# EAGLE board teclado_severino_importado (EAGLE 7.3.0)
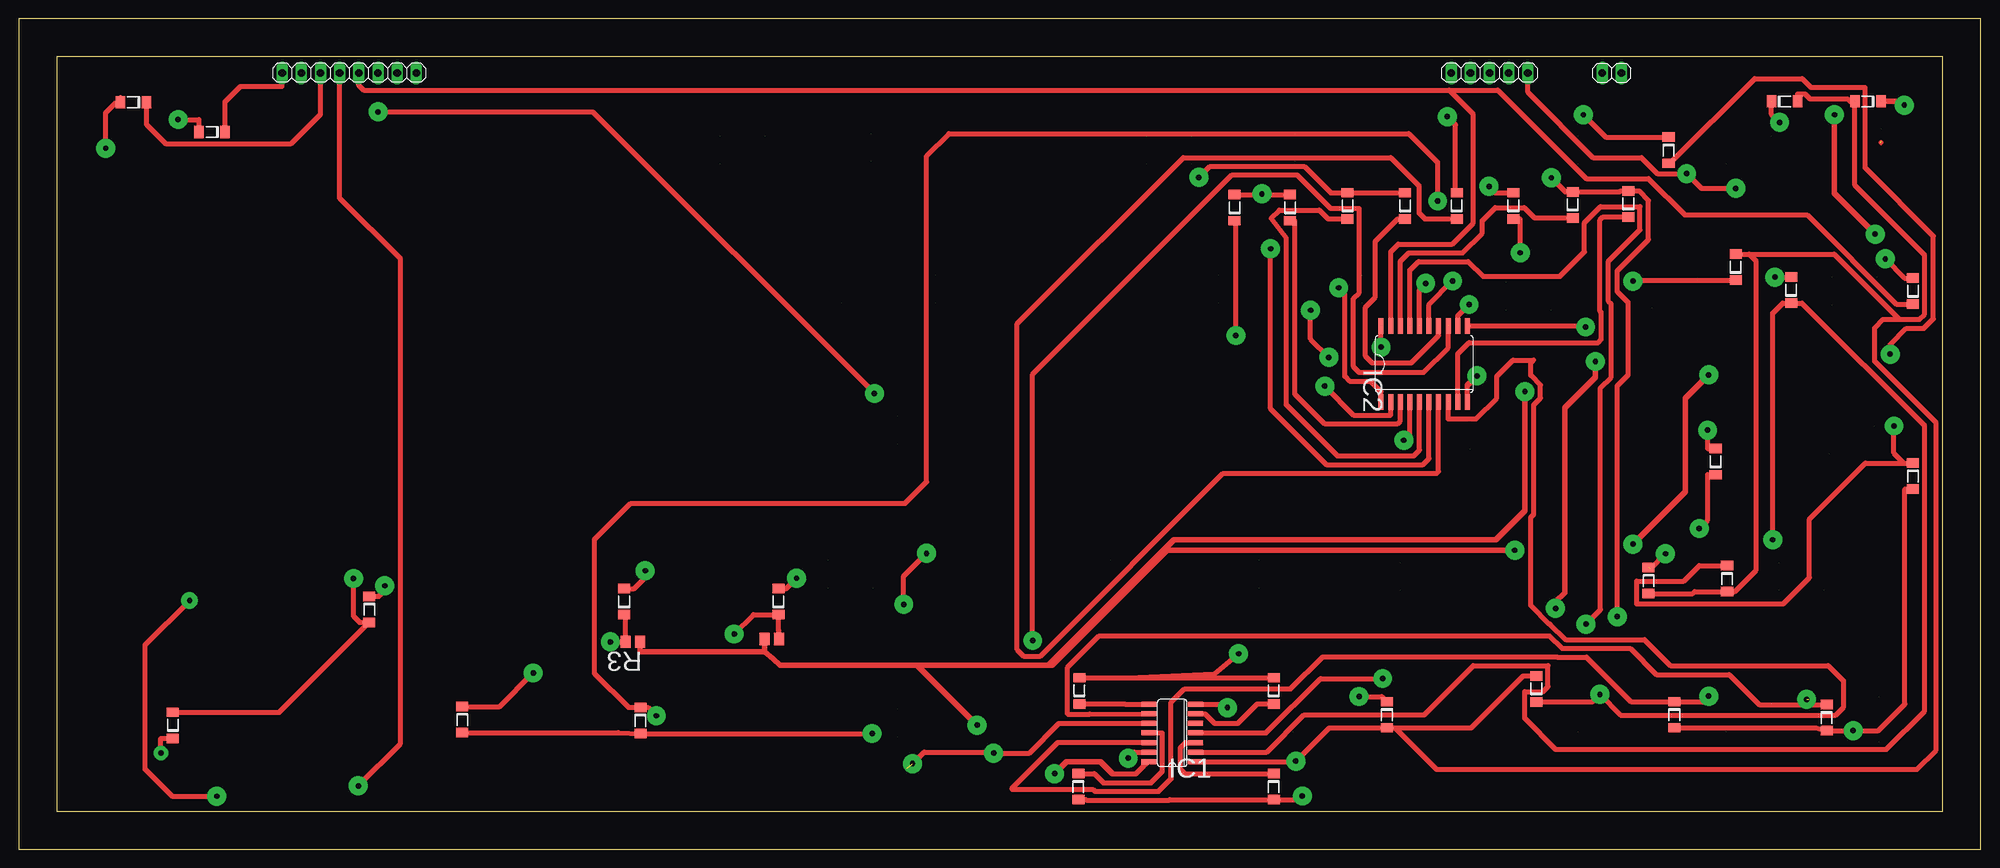
[diagram p0: board, top side]
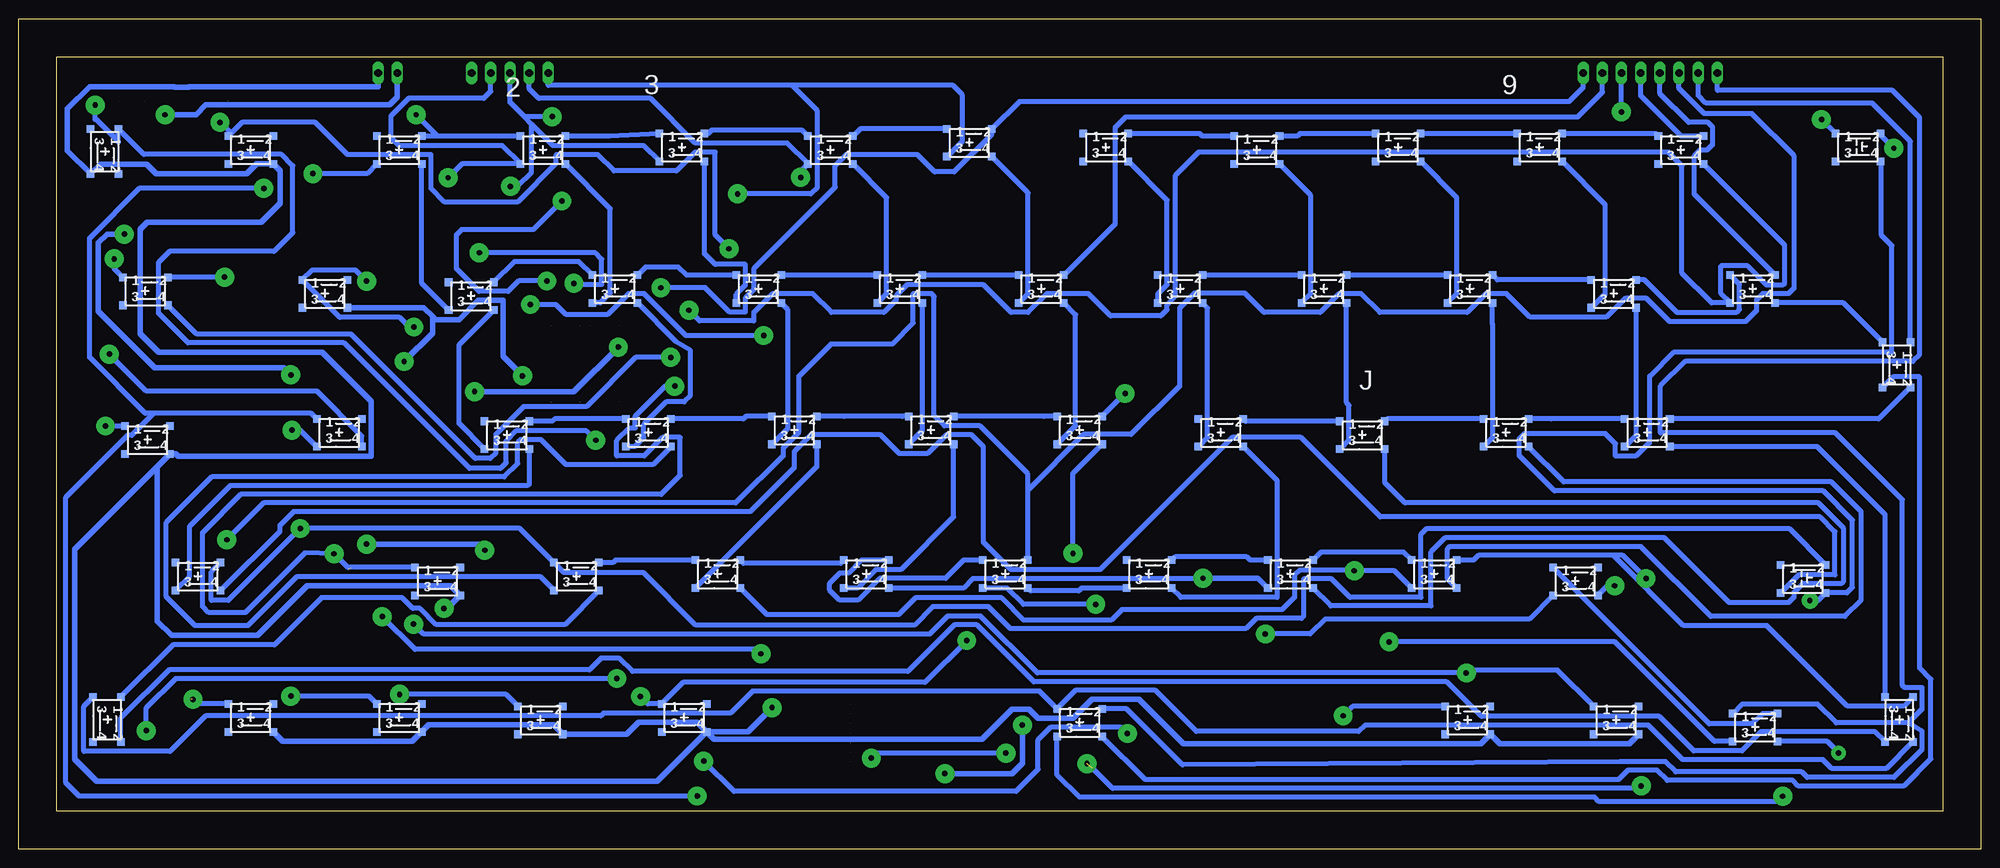
[diagram p1: board, bottom side, seen from below]

Size 260 x 110 mm. Coordinates in mm from the lower left corner, seen from the top.
Outline: 0,0 260,0 260,110 0,110 0,0
Copper layers (1*16): Top 0.035mm / dielectric 1.5mm / Bottom 0.035mm
Design rules "keyboard": minimum track width 10mil, minimum drill 24mil, track to track 8mil, track to pad 8mil, pad to pad 8mil, via to via 8mil, smd to smd 8mil, copper to edge 40mil, drill to drill 8mil, minimum pad ring 0mil, minimum via ring 0mil, stop-mask expansion 4mil, vias tented up to drill 0mil, thermal gap 10mil
Milling: 4 lines

## Footprints (pad centres in the part's own frame; a part is rotated, then mirrored left to right if it is on the bottom)
B3F-40XX_2PRIMARY = smd 1 x 1: 1 -3.048,1.778; 2 2.921,1.778; 3 -3.048,-1.905; 4 2.921,-1.905
MINISWITCH_SMD_1PRIMARY = smd 1 x 1: 1 -3.048,1.778; 2 2.921,1.778; 3 -3.048,-1.905; 4 2.921,-1.905
MELF-D3512-1405_1PRIMARY = smd 1.25 x 1.6: 1 -1.725,0; 2 1.725,0
P:EX59Y59D591 = drill 1.5 pad 1.5: 1 0,0
P:EX118Y118D1181 = drill 3 pad 3: 1 0,0
B3F-40XX_1PRIMARY = smd 1 x 1: 1 -3.048,1.778; 2 2.921,1.778; 3 -3.048,-1.905; 4 2.921,-1.905
SO14_1PRIMARY = smd 0.66 x 2.032: 1 -3.81,-3.073; 2 -2.54,-3.073; 3 -1.27,-3.073; 4 0,-3.073; 5 1.27,-3.073; 6 2.54,-3.073; 7 3.81,-3.073; 8 3.81,3.073; 9 2.54,3.073; 10 1.27,3.073; 11 0,3.073; 12 -1.27,3.073; 13 -2.54,3.073; 14 -3.81,3.073
SO20W_1PRIMARY = smd 0.66 x 2.032: 1 -5.715,-5.029; 2 -4.445,-5.029; 3 -3.175,-5.029; 4 -1.905,-5.029; 5 -0.635,-5.029; 6 0.635,-5.029; 7 1.905,-5.029; 8 3.175,-5.029; 9 4.445,-5.029; 10 5.715,-5.029; 11 5.715,5.029; 12 4.445,5.029; 13 3.175,5.029; 14 1.905,5.029; 15 0.635,5.029; 16 -0.635,5.029; 17 -1.905,5.029; 18 -3.175,5.029; 19 -4.445,5.029; 20 -5.715,5.029
1X05_1PRIMARY = drill 1.016 pad 1.524 long: 1 -5.08,0; 2 -2.54,0; 3 0,0; 4 2.54,0; 5 5.08,0
1X08_1PRIMARY = drill 1.016 pad 1.524 long: 1 -8.89,0; 2 -6.35,0; 3 -3.81,0; 4 -1.27,0; 5 1.27,0; 6 3.81,0; 7 6.35,0; 8 8.89,0
1X02_1PRIMARY = drill 1.016 pad 1.524 long: 1 -1.27,0; 2 1.27,0
M0805_1PRIMARY = smd 1.321 x 1.6: 1 -0.95,0; 2 0.965,0

## Placement (x,y rotation side)
0  [B3F-40XX_2PRIMARY]  39.67,92.68 0 bottom
1  [B3F-40XX_2PRIMARY]  209.52,92.68 0 bottom
2  [B3F-40XX_2PRIMARY]  190.47,92.68 0 bottom
3  [B3F-40XX_2PRIMARY]  172.05,93.01 0 bottom
4  [B3F-40XX_2PRIMARY]  152.37,92.68 0 bottom
5  [B3F-40XX_2PRIMARY]  133.95,93.64 0 bottom
6  [B3F-40XX_2PRIMARY]  115.87,93.01 0 bottom
7  [B3F-40XX_2PRIMARY]  95.85,92.68 0 bottom
8  [B3F-40XX_2PRIMARY]  77.13,93.01 0 bottom
9  [B3F-40XX_2PRIMARY]  58.39,93.01 0 bottom
,_COMMA_  [B3F-40XX_2PRIMARY]  29.81,16.17 0 bottom
._PERIOD_  [B3F-40XX_2PRIMARY]  53.64,35.53 0 bottom
A  [B3F-40XX_2PRIMARY]  195.24,54.91 0 bottom
B  [B3F-40XX_2PRIMARY]  110.15,36.49 0 bottom
BREAK  [MINISWITCH_SMD_1PRIMARY]  16.17,93.01 0 bottom
C  [B3F-40XX_2PRIMARY]  147.62,36.49 0 bottom
CAPS  [MINISWITCH_SMD_1PRIMARY]  23.46,35.86 0 bottom
CAPS1  [B3F-40XX_2PRIMARY]  236.19,36.16 0 bottom
CAPSLOCK  [B3F-40XX_2PRIMARY]  204.44,35.53 0 bottom
D  [B3F-40XX_2PRIMARY]  157.14,55.54 0 bottom
D1  [MELF-D3512-1405_1PRIMARY]  251.03,73.93 270 top
D2  [MELF-D3512-1405_1PRIMARY]  25.61,95.01 0 top
D3  [MELF-D3512-1405_1PRIMARY]  15.19,98.95 0 top
D4  [MELF-D3512-1405_1PRIMARY]  218.65,92.6 90 top
D5  [MELF-D3512-1405_1PRIMARY]  224.87,51.32 270 top
D6  [MELF-D3512-1405_1PRIMARY]  100.66,32.78 270 top
D7  [MELF-D3512-1405_1PRIMARY]  205.95,85.36 270 top
D8  [MELF-D3512-1405_1PRIMARY]  198.07,85.23 270 top
D9  [MELF-D3512-1405_1PRIMARY]  80.22,32.78 270 top
D10  [MELF-D3512-1405_1PRIMARY]  183.72,85.23 270 top
D11  [MELF-D3512-1405_1PRIMARY]  20.4,16.4 270 top
D12  [MELF-D3512-1405_1PRIMARY]  46.43,31.77 90 top
D13  [MELF-D3512-1405_1PRIMARY]  161.11,84.98 270 top
D14  [MELF-D3512-1405_1PRIMARY]  166.32,8.27 90 top
D15  [MELF-D3512-1405_1PRIMARY]  226.39,35.83 90 top
D16  [MELF-D3512-1405_1PRIMARY]  213.31,85.49 270 top
D17  [MELF-D3512-1405_1PRIMARY]  215.98,35.58 90 top
D18  [MELF-D3512-1405_1PRIMARY]  190.58,85.23 270 top
D19  [MELF-D3512-1405_1PRIMARY]  245.06,99.08 0 top
D20  [MELF-D3512-1405_1PRIMARY]  234.01,99.08 180 top
D21  [MELF-D3512-1405_1PRIMARY]  201.12,21.22 270 top
D22  [MELF-D3512-1405_1PRIMARY]  58.75,17.16 90 top
D23  [MELF-D3512-1405_1PRIMARY]  82.37,17.03 90 top
D24  [MELF-D3512-1405_1PRIMARY]  181.31,17.8 90 top
D25  [MELF-D3512-1405_1PRIMARY]  227.54,77.1 270 top
D26  [MELF-D3512-1405_1PRIMARY]  166.32,20.97 270 top
D27  [MELF-D3512-1405_1PRIMARY]  251.03,49.42 90 top
D28  [MELF-D3512-1405_1PRIMARY]  239.6,17.41 90 top
D29  [MELF-D3512-1405_1PRIMARY]  176.1,85.23 270 top
D30  [MELF-D3512-1405_1PRIMARY]  168.48,84.98 270 top
D31  [MELF-D3512-1405_1PRIMARY]  219.41,17.8 90 top
D32  [MELF-D3512-1405_1PRIMARY]  140.54,20.97 270 top
D33  [MELF-D3512-1405_1PRIMARY]  140.41,8.27 90 top
DELETE  [B3F-40XX_2PRIMARY]  243.17,73.96 0 bottom
DEXTRA  [MELF-D3512-1405_1PRIMARY]  234.9,74.06 270 top
DOWN  [B3F-40XX_2PRIMARY]  48.23,17.11 0 bottom
DUMMY1  [P:EX59Y59D591]  253.97,63.8 0 top
DUMMY2  [P:EX59Y59D591]  4.73,55.21 0 top
DUMMY3  [P:EX118Y118D1181]  238.33,103.39 0 top
DUMMY4  [P:EX118Y118D1181]  162.86,103.47 0 top
DUMMY5  [P:EX118Y118D1181]  86.96,103.17 0 top
DUMMY6  [P:EX118Y118D1181]  6.17,103.14 0 top
DUMMY7  [P:EX118Y118D1181]  53.64,63.47 0 top
DUMMY8  [P:EX118Y118D1181]  129.51,64.1 0 top
DUMMY9  [P:EX118Y118D1181]  205.71,63.8 0 top
DUMMY10  [P:EX118Y118D1181]  220.01,27.6 0 top
DUMMY11  [P:EX118Y118D1181]  133.32,17.44 0 top
DUMMY12  [P:EX118Y118D1181]  38.81,27.19 0 top
E  [B3F-40XX_2PRIMARY]  161.89,74.26 0 bottom
EDIT  [B3F-40XX_2PRIMARY]  217.47,55.21 0 bottom
ENTER  [B3F-40XX_1PRIMARY]  11.09,64.1 270 bottom
EXTEND  [B3F-40XX_2PRIMARY]  242.87,54.27 0 bottom
F  [B3F-40XX_2PRIMARY]  139.03,55.54 0 bottom
G  [B3F-40XX_2PRIMARY]  119.35,55.54 0 bottom
GRAPHICS  [B3F-40XX_2PRIMARY]  219.37,73.63 0 bottom
H  [B3F-40XX_2PRIMARY]  100.63,55.21 0 bottom
I  [B3F-40XX_2PRIMARY]  67.61,74.26 0 bottom
IC1  74HC32  [SO14_1PRIMARY]  152.86,15.38 90 top
IC2  74LS244DW  [SO20W_1PRIMARY]  186.26,64.28 0 top
INVV  [B3F-40XX_2PRIMARY]  229.2,92.68 0 bottom
J  [B3F-40XX_2PRIMARY]  81.88,54.91 0 bottom
JP1  [1X05_1PRIMARY]  194.91,102.84 180 top
JP2  [1X08_1PRIMARY]  43.78,102.84 180 top
JP3  [1X02_1PRIMARY]  211.12,102.84 0 top
K  [B3F-40XX_2PRIMARY]  62.83,55.21 0 bottom
L  [B3F-40XX_2PRIMARY]  44.11,55.21 0 bottom
LEFT  [B3F-40XX_2PRIMARY]  190.8,17.11 0 bottom
M  [B3F-40XX_2PRIMARY]  72.36,36.49 0 bottom
N  [B3F-40XX_2PRIMARY]  91.41,36.49 0 bottom
O  [B3F-40XX_2PRIMARY]  48.56,73.63 0 bottom
P  [B3F-40XX_2PRIMARY]  30.14,74.26 0 bottom
Q  [B3F-40XX_2PRIMARY]  199.99,73.32 0 bottom
QUOTES  [B3F-40XX_2PRIMARY]  209.52,17.44 0 bottom
R  [B3F-40XX_2PRIMARY]  143.17,74.26 0 bottom
R2  10K  [M0805_1PRIMARY]  99.77,27.83 0 top
R3  10K  [M0805_1PRIMARY]  81.36,27.45 180 top
RIGHT  [B3F-40XX_2PRIMARY]  171.75,17.44 0 bottom
S  [B3F-40XX_2PRIMARY]  176.5,55.21 0 bottom
SEMICOLON  [B3F-40XX_2PRIMARY]  229.2,17.44 0 bottom
SPACE  [B3F-40XX_2PRIMARY]  119.35,16.81 0 bottom
SYMB  [B3F-40XX_1PRIMARY]  10.76,17.11 270 bottom
SYMB1  [B3F-40XX_1PRIMARY]  248.25,17.11 270 bottom
T  [B3F-40XX_2PRIMARY]  124.43,74.26 0 bottom
TRUEV  [B3F-40XX_1PRIMARY]  248.58,92.37 270 bottom
U  [B3F-40XX_2PRIMARY]  86.96,74.26 0 bottom
UP  [B3F-40XX_2PRIMARY]  67.91,17.11 0 bottom
V  [B3F-40XX_2PRIMARY]  129.2,36.49 0 bottom
W  [B3F-40XX_2PRIMARY]  180.94,74.26 0 bottom
X  [B3F-40XX_2PRIMARY]  167.3,36.49 0 bottom
Y  [B3F-40XX_2PRIMARY]  106.01,74.26 0 bottom
Z  [B3F-40XX_2PRIMARY]  186.02,36.16 0 bottom

## Library data of the parts
0 1-9 ,_COMMA_ ._PERIOD_ A B BREAK C CAPS CAPS1 CAPSLOCK D D1-D33 DELETE DEXTRA DOWN DUMMY1-DUMMY12 E EDIT ENTER EXTEND F G GRAPHICS H I IC1 IC2 INVV J JP1-JP3 K L LEFT M N O P Q QUOTES R R2 R3 RIGHT S SEMICOLON SPACE SYMB SYMB1 T TRUEV U UP V W X Y Z = keyboard

## Nets
A8: D3.2 DEXTRA.2 IC1.2 JP2.6 V.2
A9: G.2 JP2.3
A10: JP2.2 T.2
A11: 5.2 IC2.1 JP2.1
A12: 0.2 D1.2 IC2.19 JP2.4
A13: IC1.10 IC1.13 JP2.5 P.2
A14: ENTER.1 JP2.7
A15: IC1.5
CAPSLOCK: CAPSLOCK.1 D17.2 IC2.2
D0: 1.3 D14.1 D33.1 EDIT.1 JP1.1
D1: 2.3 D7.1 D16.1 D26.1 D32.1 JP1.2
D2: 3.3 D8.1 D18.1 JP1.3
D3: 4.3 D10.1 D29.1 JP1.4
D4: 5.3 D13.1 D30.1 JP1.5
DOWN: D22.2 DOWN.1 IC2.17
EXTEND: D15.2 D27.2 EXTEND.1
GND: CAPSLOCK.4 DOWN.4 EXTEND.4 GRAPHICS.4 IC1.7 IC2.10 INVV.4 JP3.2 LEFT.4 QUOTES.4 RIGHT.4 SEMICOLON.4 TRUEV.4 UP.4
GRAPHICS: D25.2 GRAPHICS.1 IC2.11
INVV: D20.2 IC2.6 INVV.1
LEFT: D21.2 IC2.8 LEFT.1
NET0_1: 0.1 9.2
NET0_4: 0.4 DELETE.4 P.3
NET1_2: 1.2 2.1 D4.2
NET1_4: 1.4 Q.3
NET2_2: 2.2 3.1
NET2_4: 2.4 W.3
NET3_2: 3.2 4.1
NET3_4: 3.4 E.3
NET4_2: 4.2 5.1
NET4_4: 4.4 R.3
NET5_4: 5.4 T.3
NET6_2: 6.2 7.1
NET6_4: 6.4 Y.3
NET7_2: 7.2 8.1
NET7_4: 7.4 U.3
NET8_2: 8.2 9.1
NET8_4: 8.4 I.3
NET9_4: 9.4 O.3
NET,_COMMA__2: ,_COMMA_.2 ._PERIOD_.1
NET,_COMMA__3: ,_COMMA_.3 D9.2 R3.2
NET,_COMMA__4: ,_COMMA_.4 D11.2
NET._PERIOD__3: ._PERIOD_.3 D6.2 R2.2
NET._PERIOD__4: ._PERIOD_.4 D12.2
NETA_2: A.2 S.1
NETA_3: A.3 Q.4
NETA_4: A.4 CAPS1.3
NETB_2: B.2 N.1
NETB_3: B.3 V.4
NETB_4: B.4 H.4
NETC_1: C.1 X.2
NETC_2: C.2 V.1
NETC_3: C.3 F.4
NETC_4: C.4 D6.1 N.3
NETCAPS1_2: CAPS1.2 Z.1
NETCAPS1_4: CAPS1.4
NETD1_A: D1.1 DELETE.1
NETD4_A: D4.1 EDIT.4
NETD5_A: D5.1 EDIT.3
NETD7_C: D7.2 IC2.18
NETD8_C: D8.2 IC2.16
NETD9_A: D9.1 M.3 X.4
NETD10_C: D10.2 IC2.14
NETD11_A: D11.1 D12.1 M.2 SYMB.1
NETD13_C: D13.2 IC2.12
NETD14_C: D14.2 IC1.3
NETD15_A: D15.1 D17.1 D19.1 D20.1 D21.1 D22.1 D23.1 D24.1 D25.1 IC1.1
NETD16_C: D16.2 IC2.9
NETD18_C: D18.2 IC2.7
NETD26_C: D26.2 IC1.6
NETD27_A: D27.1 D28.1 D31.1 IC1.4
NETD29_C: D29.2 IC2.5
NETD30_C: D30.2 IC2.3
NETD32_C: D32.2 IC1.8
NETD33_C: D33.2 IC1.11
NETD_1: D.1 S.2
NETD_2: D.2 F.1
NETD_3: D.3 E.4
NETD_4: D.4 X.3
NETDELETE_2: DELETE.2 DEXTRA.1
NETE_1: E.1 W.2
NETE_2: E.2 R.1
NETENTER_2: ENTER.2 L.2
NETENTER_3: ENTER.3 P.4
NETENTER_4: ENTER.4 SPACE.4
NETF_2: F.2 G.1
NETF_3: F.3 R.4
NETG_3: G.3 T.4
NETG_4: G.4 V.3
NETH_2: H.2 J.1
NETH_3: H.3 Y.4
NETI_1: I.1 U.2
NETI_2: I.2 O.1
NETI_4: I.4 K.3
NETJ_2: J.2 K.1
NETJ_3: J.3 U.4
NETJ_4: J.4 N.4
NETK_2: K.2 L.1
NETK_4: K.4 M.4
NETL_3: L.3 O.4
NETL_4: L.4 SYMB.3
NETM_1: M.1 N.2
NETO_2: O.2 P.1
NETQ_2: Q.2 W.1
NETR_2: R.2 T.1
NETS_3: S.3 W.4
NETS_4: S.4 Z.3
NETSPACE_1: SPACE.1 SYMB1.3 SYMB.2
NETSYMB1_1: SYMB1.1 Z.4
NETSYMB1_2: SYMB1.2 SYMB.4
NETU_1: U.1 Y.2
NETX_1: X.1 Z.2
QUOTES: D31.2 IC1.12 QUOTES.1
RIGHT: D24.2 IC2.13 RIGHT.1
SEMICOLON: D28.2 IC1.9 SEMICOLON.1
TRUEV: D19.2 IC2.4 TRUEV.1
UP: D23.2 IC2.15 UP.1
VCC: IC1.14 IC2.20 JP3.1 R2.1 R3.1
VET: ,_COMMA_.1 D2.2 JP2.8 SPACE.2

## Tracks (layer width: path | path; a pad name or v marks a point on that pad's centre or on a via)
A8  (via drill 0.71 pad 2.5)  (2 unrouted)
  Top 0.65: D3.2 16.92,95.98 19.43,93.46 36.09,93.46 39.97,97.35 JP2.6 | IC1.2 165.38,12.84 170.33,17.8 186.26,17.8 192.76,24.3 202.67,24.3 202.67,21.53 202.01,20.87 199.57,20.87 199.57,17.31 203.66,13.22 247.52,13.22 252.58,18.28 252.58,56.07 236.32,72.33 DEXTRA.2 233.76,72.33 232.44,71.01 v232.44,40.98
  Bottom 0.65: JP2.6 39.97,100.79 36.63,97.45 30.32,97.45 24.71,91.84 24.71,74.36 25.48,73.58 28.87,73.58 29.67,72.79 29.67,71.39 31.17,69.89 41.22,69.89 44.3,72.96 47.12,72.96 49.61,70.47 59.72,70.47 62.84,73.6 65.56,73.6 68.05,71.11 79.63,71.11 82.12,73.6 85.04,73.6 87.53,71.11 94.97,71.11 97.51,73.65 104.22,73.65 106.15,71.72 106.15,61.37 112.59,54.93 118.88,54.93 126.28,47.52 | V.2 126.28,47.52 | v232.44,40.98 227.57,45.85 164.99,45.85 158.66,52.18 158.66,53.19 156.62,55.23 156.62,62.68 152.38,66.92 144.27,66.92 141.48,69.71 141.48,73.58 139.03,73.58 138.69,73.24 138.69,57.42 137.34,56.07 132.63,56.07 126.28,49.72 126.28,47.52
A9  (via drill 0.71 pad 2.5)  (2 unrouted)
  Top 0.65: v113.39,60.36 76.07,97.68 v47.59,97.68
  Bottom 0.65: v113.39,60.36 G.2 | v47.59,97.68 JP2.3
A10  (2 unrouted)
  Bottom 0.65: T.2 114.68,82.87 114.68,95.65 113.34,96.99 53.42,96.99 50.13,100.28 JP2.2
A11  (via drill 0.71 pad 2.5)  (2 unrouted)
  Top 0.65: IC2.1 180.55,60.59 179.15,61.99 176.35,61.99 175.72,62.63 175.72,73.57 v174.92,74.37
  Bottom 0.65: v174.92,74.37 169.03,74.37 165.79,71.13 163.72,71.13 163.72,73.04 162.56,74.2 162.56,76.98 151.82,87.72 151.82,90.57 150.37,92.01 140.92,92.01 138.64,89.73 136.04,89.73 131.03,94.74 5.2 127.41,99.05 54.57,99.05 52.67,100.94 JP2.1
A12  (2 unrouted)
  Top 0.65: IC2.19 181.82,79.14 182.83,80.15 189.97,80.15 192.76,82.95 192.76,97.35 189.56,100.55 | JP2.4 45.05,101.2 45.71,100.55 189.56,100.55 | D1.2 248.84,72.2 237.02,84.03 220.78,84.03 215.97,88.84 207.73,88.84 196.02,100.55 189.56,100.55
  Bottom 0.65: 0.2 39.7,94.46 45.05,99.81 JP2.4
A13  (via drill 0.71 pad 2.5)  (5 unrouted)
  Top 0.65: v118.44,11.32 119.97,12.84 129.06,12.84 v129.19,12.71 133.91,12.71 137.85,16.65 IC1.10 | JP2.5 42.51,86.26 50.57,78.2 50.57,13.96 v44.99,8.37 | IC1.13 147.81,12.84 v147.02,12.05
  Bottom 0.65: 117.68,10.68 115.04,8.04 45.32,8.04 v44.99,8.37 | P.2 37.98,86.79 37.98,91.84 37.19,92.62 36.27,92.62 35.51,93.39 35.51,95.65 36.16,96.29 38.7,96.29 42.51,100.11 JP2.5 | v147.02,12.05 146.36,12.71 v129.19,12.71
A14  (1 unrouted)
  Bottom 0.65: JP2.7 37.43,99.88 36.4,98.85 14.39,98.85 9.32,93.78 ENTER.1
CAPSLOCK  (via drill 0.71 pad 2.5)  (1 unrouted)
  Top 0.65: IC2.2 181.82,57.51 176.9,57.51 v173.08,61.33 | 216.27,37.17 v218.22,39.12
  Bottom 0.65: v173.08,61.33 174.35,61.33 178.32,57.36 178.32,55.77 179.15,55.77 180.77,54.14 180.77,52.08 177.12,52.08 174.65,54.55 172.34,54.55 172.34,49.52 174.86,47 230.58,47 235.65,41.94 235.65,32.15 234.83,31.33 229.97,31.33 222.06,39.25 v218.22,39.12 216.4,37.31 CAPSLOCK.1
D0  (via drill 0.71 pad 2.5)  (2 unrouted)
  Top 0.65: D33.1 141.42,6.54 141.49,6.48 152.49,6.48 152.55,6.54 D14.1 169.62,6.54 v170.1,7.03 | v227.54,87.54 222.99,87.54 v221.03,89.5 217.15,89.5 215.04,91.61 208.64,91.61 199.99,100.25 JP1.1
  Bottom 0.65: v227.54,87.54 244.05,87.54 250.63,80.95 250.63,65.13 243.22,57.72 242.12,57.72 | 1.3 213.84,89.5 v221.03,89.5 | EDIT.1 221.25,57.72 242.12,57.72 | 242.12,57.72 245.04,54.8 245.59,54.8 253.77,46.62 253.77,8.78 252.02,7.03 v170.1,7.03
D1  (via drill 0.71 pad 2.5)  (1 unrouted)
  Top 0.65: v203.1,88.94 204.96,87.08 D7.1 212.13,87.08 212.26,87.21 D16.1 214.71,87.21 215.99,85.93 215.99,80.74 211.84,76.6 211.84,73.85 213.29,72.4 213.29,62.84 211.84,61.38 v211.84,30.8 | v161.65,25.87 158.47,23.23 146.88,22.7 | D32.1 146.88,22.7 | 146.88,22.7 D26.1
  Bottom 0.65: v203.1,88.94 201.27,90.77 2.3 195.94,93.2 209.63,93.2 210.66,94.23 210.66,97.14 208.35,99.46 198.38,99.46 197.45,100.38 JP1.2 | v211.84,30.8 207.49,26.45 162.23,26.45 v161.65,25.87
D2  (via drill 0.71 pad 2.5)  (1 unrouted)
  Top 0.65: v189.31,97.04 190.4,95.95 190.4,86.96 D18.1 | D8.1 195.69,86.96 v194.85,87.8
  Bottom 0.65: 192.06,96.06 192.99,97 | 192.99,97 194.91,98.92 JP1.3 | 192.99,97 192.95,97.04 v189.31,97.04 | 3.3 177.21,93.21 189.2,93.21 192.06,96.06 | v194.85,87.8 193.9,87.8 192.06,89.64 192.06,96.06
D3  (via drill 0.71 pad 2.5)  (2 unrouted)
  Top 0.65: D10.1 D29.1 173.87,86.96 170.36,90.46 157.86,90.46 v156.39,88.99
  Bottom 0.65: v156.39,88.99 156.39,89.8 4.3 158.18,93.54 170.36,93.54 176.28,99.46 191.1,99.46 192.37,100.73 JP1.4
D4  (via drill 0.71 pad 2.5)  (1 unrouted)
  Top 0.65: v164.75,86.81 164.86,86.7 | D13.1 164.86,86.7 | 164.86,86.7 D30.1
  Bottom 0.65: 157.56,101.18 154.18,97.81 154.18,87.65 155.02,86.81 v164.75,86.81 | 5.3 134.95,93.79 134.95,99.91 136.22,101.18 157.56,101.18 | JP1.5 189.83,101.18 157.56,101.18
DOWN  (via drill 0.71 pad 2.5)  (1 unrouted)
  Top 0.65: IC2.17 184.36,76.71 185.5,77.85 192.1,77.85 194.07,75.89 204.24,75.89 207.5,79.14 207.5,83 209.63,85.13 214.84,85.13 214.84,82.03 210.69,77.89 210.69,72.58 211.03,72.25 211.03,62.52 209.63,61.13 209.63,31.74 v207.7,29.81 | v68.18,23.33 63.73,18.88 D22.2
  Bottom 0.65: v207.7,29.81 206.35,28.46 139.3,28.46 136.91,30.85 132.55,30.85 125.03,23.33 v68.18,23.33 67.81,23.7 56.09,23.7 DOWN.1
EXTEND  (via drill 0.71 pad 2.5)  (1 unrouted)
  Top 0.65: v248.52,56.05 248.52,52.47 249.84,51.14 | D15.2 222.71,37.55 220.65,35.5 214.43,35.5 214.43,32.48 233.84,32.48 237.31,35.96 237.31,43.73 244.73,51.14 249.84,51.14 | 249.84,51.14 D27.2
  Bottom 0.65: EXTEND.1 v248.52,56.05
GND  (via drill 0.71 pad 2.5)  (7 unrouted)
  Top 0.66: IC1.7 159.72,19.19 | IC2.10 191.98,61.43
  Top 0.7: v203.66,31.89 203.66,32.76 204.88,33.98 204.88,58.48 208.94,62.54 v208.94,64.61 | 159.72,19.19 v160.18,18.73 | 191.98,61.43 v193.25,62.7
  Bottom 0.7: 203.66,32.76 v203.66,31.89 203.25,31.89 CAPSLOCK.4 202.77,34.87 221.76,34.87 228.32,28.31 239.75,28.31 241.66,30.22 241.66,50.66 | RIGHT.4 163.37,15.54 v160.18,18.73 | RIGHT.4 167.87,14.58 132.35,14.58 128.4,18.53 126.12,18.53 124.9,17.31 120.33,17.31 117.8,19.84 111.55,19.84 105.65,13.93 66.27,13.93 UP.4 63.72,13.93 46.58,13.93 DOWN.4 | RIGHT.4 170.09,16.8 177.85,16.8 179.45,15.21 LEFT.4 189.14,16.47 205.66,16.47 QUOTES.4 207.87,14.27 225.01,14.27 SEMICOLON.4 | RIGHT.4 175.38,8.98 249.66,8.98 252.58,11.91 252.58,39.74 241.66,50.66 | GRAPHICS.4 206.33,71.72 205.18,70.58 | v193.25,62.7 195.81,65.27 195.81,72.69 199.11,72.69 201.65,70.14 204.75,70.14 205.18,70.58 | JP3.2 212.39,101.01 237.41,101.01 237.49,100.92 239.36,100.92 239.44,101.01 250.62,101.01 253.57,98.06 253.57,92.53 TRUEV.4 249.17,90.77 243.08,90.77 241.78,89.47 229.81,89.47 228.51,90.77 INVV.4 225.38,89.87 225.38,85.54 227.87,83.05 243,83.05 243.91,82.14 243.91,68.28 241.48,65.85 219.81,65.85 213.29,59.32 213.29,52.03 238.89,52.03 239.22,52.37 EXTEND.4 241.66,50.66 | 205.18,70.58 205.18,68.37 v208.94,64.61
GRAPHICS  (via drill 0.71 pad 2.5)  (1 unrouted)
  Top 0.65: v207.65,69.17 207.51,69.31 IC2.11 | v213.92,75.25 214.05,75.38 D25.2
  Bottom 0.65: v207.65,69.17 208.28,69.17 209.55,70.44 217.46,70.44 GRAPHICS.1 221.13,76.7 215.37,76.7 v213.92,75.25
INVV  (via drill 0.71 pad 2.5)  (2 unrouted)
  Top 0.65: v233.35,96.28 232.29,97.35 D20.2 | v165.89,79.54 165.89,58.33 173.28,50.94 186.11,50.94 186.9,51.73 IC2.6
  Bottom 0.65: 231.89,94.82 INVV.1 | v165.89,79.54 167.72,81.37 167.72,92.34 170.36,92.34 172.85,89.86 181.13,89.86 183.29,92.01 188.78,92.01 188.78,90.86 193.92,85.72 203.56,85.72 205.37,87.53 205.37,92.01 216.44,92.01 220.7,96.28 230.43,96.28 231.89,94.82 | 231.89,94.82 v233.35,96.28
LEFT  (via drill 0.71 pad 2.5)  (1 unrouted)
  Top 0.65: IC2.8 189.44,57.01 193.12,57.01 195.86,59.76 195.86,62.63 198.02,64.78 200.74,64.78 200.36,64.4 200.36,62.77 201.67,61.46 201.67,59.74 200.77,58.84 200.77,44.36 200.36,43.95 200.36,32.26 202.8,29.82 202.94,29.82 205.02,27.73 215.45,27.73 218.89,24.3 239.8,24.3 241.86,22.24 241.86,18.81 240.8,17.75 212.26,17.75 v209.53,20.49 208.54,19.5 D21.2
  Bottom 0.65: LEFT.1 195.44,20.49 v209.53,20.49
NET0_1
  Bottom 0.65: 9.2 43.05,94.79 0.1
NET0_4  (via drill 0.71 pad 2.5)  (1 unrouted)
  Top 0.65: v173.61,65.14 171.2,67.55 v171.2,71.39
  Bottom 0.65: 0.4 25.99,80.01 25.99,74.97 26.22,74.73 28.34,74.73 30.89,77.28 34.42,77.28 34.42,73.59 P.3 35.64,72.36 39.6,76.32 39.6,90.57 41.38,92.34 103.64,92.34 106.68,89.3 106.68,73.29 107.83,72.15 107.83,71.49 108.66,70.65 115.32,70.65 118.27,73.6 123.75,73.6 126.24,71.11 128.5,71.11 132.13,74.74 142.32,74.74 143.68,73.38 143.68,72.79 145.36,71.11 152.3,71.11 154.79,73.6 160.1,73.6 162.57,71.13 162.57,69.98 169.79,69.98 v171.2,71.39 | DELETE.4 236.41,68.21 215.98,68.21 199.52,51.76 197.49,51.76 196.78,52.47 196.78,54.98 193.12,58.64 184.76,58.64 178.26,65.14 v173.61,65.14
NET1_2  (via drill 0.71 pad 2.5)  (1 unrouted)
  Top 0.65: v207.34,97.3 210.32,94.32 D4.2
  Bottom 0.65: 204.5,94.46 1.2 | 204.5,94.46 v207.34,97.3 | 2.1 204.5,94.46
NET1_4  (2 unrouted)
  Bottom 0.65: Q.3 206.6,74.97 1.4
NET2_2
  Bottom 0.65: 3.1 181.76,94.46 2.2
NET2_4
  Bottom 0.65: W.3 182.96,72.36 181.62,73.7 181.62,84.84 2.4
NET3_2  (2 unrouted)
  Bottom 0.65: 4.1 156.21,95.25 168.16,95.25 168.63,94.79 3.2
NET3_4  (1 unrouted)
  Bottom 0.65: E.3 164.94,73.51 163.71,74.74 163.71,77.46 167.72,77.46 169.13,78.87 3.4
NET4_2  (1 unrouted)
  Bottom 0.65: 4.2 148.48,95.42 5.1
NET4_4  (1 unrouted)
  Bottom 0.65: 4.4 144.99,86.31 144.99,73.59 R.3
NET5_4
  Bottom 0.65: 5.4 126.24,86.95 126.24,73.59 T.3
NET6_2  (2 unrouted)
  Bottom 0.65: 6.2 103.49,94.79 103.16,94.46 7.1
NET6_4  (2 unrouted)
  Bottom 0.65: 6.4 107.84,85.99 107.84,74.79 109.06,73.57 Y.3
NET7_2  (1 unrouted)
  Bottom 0.65: 8.1 90.22,94.79 90.55,94.46 7.2
NET7_4  (1 unrouted)
  Bottom 0.65: U.3 88.78,73.59 88.78,86.62 7.4
NET8_2
  Bottom 0.65: 8.2 9.1
NET8_4
  Bottom 0.65: I.3 69.42,73.59 69.42,86.31 8.4
NET9_4
  Bottom 0.65: 9.4 49.77,85.4 49.77,73.56 O.3
NET,_COMMA__2
  Bottom 0.65: ._PERIOD_.1 35.98,16.6 30.23,16.6 28.88,17.95 ,_COMMA_.2
NET,_COMMA__3  (via drill 0.71 pad 2.5)
  Top 0.65: D9.2 80.39,31.06 R3.2 v78.39,27.45
  Bottom 0.65: v78.39,27.45 48.46,27.45 35.28,14.27 ,_COMMA_.3
NET,_COMMA__4  (via drill 0.71 pad 1.9)
  Top 0.65: v18.82,12.74 18.82,14.67 D11.2
  Bottom 0.65: ,_COMMA_.4 20.35,14.27 v18.82,12.74
NET._PERIOD__3  (via drill 0.71 pad 2.5)
  Top 0.65: R2.2 100.74,28.88 100.66,28.96 D6.2 97.37,31.06 v94.81,28.5
  Bottom 0.65: ._PERIOD_.3 59.83,30.48 86.85,30.48 88.83,28.5 v94.81,28.5
NET._PERIOD__4  (via drill 0.71 pad 2.5)
  Top 0.65: D12.2 47.7,33.49 48.49,34.28 v48.49,34.89
  Bottom 0.65: v48.49,34.89 49.45,34.89 ._PERIOD_.4
NETA_2  (1 unrouted)
  Bottom 0.65: S.1 188.98,56.99 189.28,56.69 A.2
NETA_3  (1 unrouted)
  Bottom 0.65: A.3 201.68,56.39 201.68,66.81 Q.4
NETA_4  (2 unrouted)
  Bottom 0.65: CAPS1.3 237.39,36.11 237.39,42.74 231.98,48.15 192.6,48.15 192.32,48.44 A.4
NETB_2  (1 unrouted)
  Bottom 0.65: B.2 106.78,38.73 97.26,38.73 96.81,38.27 N.1
NETB_3  (1 unrouted)
  Bottom 0.65: B.3 119.16,34.59 119.53,34.21 125.91,34.21 V.4
NETB_4  (1 unrouted)
  Bottom 0.65: B.4 106.01,33.36 93.22,33.36 93.22,48.82 H.4
NETBREAK_1  (via drill 0.71 pad 2.5)
  Top 0.65: v21.1,96.66 23.88,96.66 23.88,95.01
  Bottom 0.65: 19.22,94.79 v21.1,96.66
NETBREAK_2  (via drill 0.71 pad 2.5)
  Top 0.65: v11.51,92.85 11.51,97.55 12.91,98.95 13.47,98.95 13.47,99.58
  Bottom 0.65: v11.51,92.85 13.44,94.79 13.25,94.79
NETBREAK_4  (via drill 0.71 pad 2.2, 0.71 pad 2.5)
  Top 0.65: v22.63,32.93 16.74,27.04 16.74,10.56 20.3,7 v26.24,7
  Bottom 0.65: 13.25,91.1 13.16,91.1 13.16,81.35 11.76,79.95 11.76,65.8 40.72,65.8 43.87,62.65 43.87,53.89 45.7,52.06 48.39,52.06 48.39,53.74 49.71,55.06 60.45,55.06 61.14,54.37 61.14,52.14 56.47,47.46 20.88,47.46 16.99,43.57 16.99,34.69 17.72,33.95 20.54,33.95 21.56,32.93 v22.63,32.93 | v26.24,7 26.95,6.29 50.57,6.29 51.16,6.87 119.46,6.87 122.4,9.81 122.4,14.9
NETC_1  (1 unrouted)
  Bottom 0.65: C.1 151.09,37.85 163.96,37.85 X.2
NETC_2  (1 unrouted)
  Bottom 0.65: V.1 134.77,38.27 137.19,35.86 145.93,35.86 148.8,32.98 151.21,32.98 152.53,34.3 152.53,35.24 151.21,36.56 150.06,36.56 148.35,38.27 C.2
NETC_3
  Bottom 0.65: F.4 136.11,44.02 143.11,37.02 146.43,37.02 148.87,34.59 C.3
NETC_4  (via drill 0.71 pad 2.5)  (1 unrouted)
  Top 0.65: D6.1 101.7,34.51 v103.08,35.88
  Bottom 0.65: v103.08,35.88 95.75,35.88 95.7,35.83 | N.3 95.7,35.83 | C.4 134.83,34.59 133.59,35.83 95.7,35.83
NETCAPS1_2  (via drill 0.71 pad 2.5)  (1 unrouted)
  Top 0.65: v222.7,42.48 223.81,43.59 223.81,49.6 224.87,49.6
  Bottom 0.65: CAPS1.2 234.5,36.71 234.5,32.94 232.24,32.94 v222.7,42.48 193.61,42.48 Z.1 187.76,36.63 177.24,36.63 170.28,29.68 141.33,29.68 138.89,32.12 131.52,32.12 128.6,29.2 97.37,29.2 95.99,30.57 89.99,30.57 89.72,30.85 89.72,35.81 86.03,35.81 83.58,33.36 74.17,33.36 74.17,41.72 73.48,42.41 25.31,42.41 20.54,37.64
NETCAPS1_4  (1 unrouted)
  Bottom 0.65: 26.51,33.95 24.13,36.34 19.31,36.34 19.31,42.05 21.27,44.01 79.56,44.01 90.1,54.55 99.19,54.55 116.72,37.02 128.53,37.02 132.18,40.68 132.18,53.33 133.73,54.88 137.09,54.88 139.58,52.39 143.31,52.39 145.8,54.88 155.02,54.88 157.2,52.7 157.2,50.59 163.09,44.7 223.6,44.7 225.39,42.91 225.39,42.13 CAPS1.4
NETD1_A  (via drill 0.71 pad 2.5)  (1 unrouted)
  Top 0.65: D1.1 249.91,75.65 v247.36,78.21
  Bottom 0.65: v247.36,78.21 247.36,76.88 DELETE.1
NETD4_A  (via drill 0.71 pad 2.5)
  Top 0.65: D4.1 218.82,90.87 230.05,102.1 236.35,102.1 237.52,100.93 244.71,100.93 244.71,90.27 253.75,81.23 253.75,70.25 252.48,68.98 250.15,68.98 248.01,66.84 v248.01,65.57
  Bottom 0.65: v248.01,65.57 243.11,60.67 220.49,60.67 214.55,54.73 EDIT.4
NETD5_A  (via drill 0.71 pad 2.5)  (1 unrouted)
  Top 0.65: D5.1 223.81,53.05 v223.81,55.51
  Bottom 0.65: EDIT.3 222.72,55.51 v223.81,55.51
NETD7_C
  Top 0.65: IC2.18 183.09,77.87 184.22,79 191.33,79 193.93,81.6 193.93,83.28 195.66,85 199.5,85 200.87,83.63 D7.2
NETD8_C  (via drill 0.71 pad 2.5)  (1 unrouted)
  Top 0.65: D8.2 198.99,83.51 v198.99,79.01 | v186.44,74.94 185.63,74.13 IC2.16
  Bottom 0.65: v198.99,79.01 183.59,79.01 182.77,78.18 182.77,74.79 186.29,74.79 v186.44,74.94
NETD9_A  (via drill 0.71 pad 2.5)  (2 unrouted)
  Top 0.65: D9.1 81.56,34.51 83.01,35.96 v83.01,36.87 83.11,36.97
  Bottom 0.65: M.3 77.69,36.87 v83.01,36.87 | X.4 160.85,31.05 143.41,31.05 141.19,33.27 129.73,33.27 126.8,30.34 115.19,30.34 113.81,31.73 92.58,31.73 90.88,33.42 90.88,36.34 90.25,36.97 83.11,36.97
NETD10_C
  Top 0.65: IC2.14 188.17,68.04 184.53,64.4 179.35,64.4 178.46,65.29 178.46,71.81 179.78,73.14 179.78,80.53 182.76,83.51 D10.2
NETD11_A  (via drill 0.71 pad 2.5)
  Top 0.65: v44.35,35.86 44.35,30.85 45.16,30.04 D12.1 34.52,18.12 D11.1
  Bottom 0.65: v44.35,35.86 47.42,38.93 48.69,38.93 | M.2 67.21,38.27 66.56,38.93 48.69,38.93 | SYMB.1 10.21,18.94 17.65,18.94 28.32,29.61 39.37,29.61 48.69,38.93
NETD13_C  (via drill 0.71 pad 2.5)
  Top 0.65: D13.2 161.29,83.25 v161.29,68.04 | v192.2,72.15 190.71,70.65 IC2.12
  Bottom 0.65: v161.29,68.04 171.57,68.04 177.13,73.6 179.2,73.6 182,70.8 187.45,70.8 188.8,72.15 v192.2,72.15
NETD14_C
  Top 0.65: IC1.3 154.61,14.11 153.92,13.42 153.92,10.59 154.52,10 D14.2
NETD15_A  (via drill 0.71 pad 2.5)  (2 unrouted)
  Top 0.65: D17.1 221.83,33.85 222.08,34.1 D15.1 227.41,34.1 230.26,36.96 230.26,77.88 229.31,78.83 | 182.36,16.07 187.88,10.56 251.56,10.56 254.1,13.1 254.1,56.47 245.94,64.63 245.94,69.03 247.09,70.19 249.24,70.19 | D21.1 199.37,22.95 192.49,16.07 182.36,16.07 | IC1.1 169.17,11.57 173.66,16.07 | 173.66,16.07 D24.1 182.36,16.07 | v169.24,11.65 173.66,16.07 | v113.09,15.31 D23.1 79.45,15.44 D22.1 | D20.1 235.74,100.05 236.71,100.05 237.38,99.38 242.39,99.38 242.7,99.08 D19.1 243.34,87.92 252.58,78.68 252.58,70.88 251.89,70.19 249.24,70.19 | 249.24,70.19 240.59,78.83 229.31,78.83 | 173.66,16.07 | D25.1 229.31,78.83
  Bottom 0.65: v169.24,11.65 165.23,7.63 127.84,7.63 124.92,10.56 124.92,14.48 123.27,16.14 113.91,16.14 v113.09,15.31
NETD16_C
  Top 0.65: D16.2 209.94,83.76 209.54,83.36 209.54,71.25 209.72,71.06 209.72,67.52 209.3,67.1 192.21,67.1 190.71,65.6 IC2.9
NETD18_C
  Top 0.65: D18.2 186.32,83.51 185.61,84.22 185.61,87.81 181.81,91.61 154.31,91.61 132.29,69.59 132.29,26.43 133.18,25.55 135.37,25.55 159.61,49.79 187.92,49.79 188.17,50.04 IC2.7
NETD26_C
  Top 0.65: D26.2 164.14,19.24 161.55,16.66 158.47,16.66 157.2,17.92 IC1.6
NETD27_A  (via drill 0.71 pad 2.5)
  Top 0.65: D31.1 238.17,16.07 D28.1 v243.11,15.69 246.46,15.69 249.98,19.2 249.98,47.69 D27.1 | IC1.4 165.31,15.38 172.52,22.6 v180.75,22.6
  Bottom 0.65: v180.75,22.6 239.25,22.6 243.11,18.73 v243.11,15.69
NETD29_C  (1 unrouted)
  Top 0.65: IC2.5 185.63,52.85 184.86,52.09 174.74,52.09 167.97,58.87 167.97,80.91 165.97,83.58 167.06,84.67 172.34,84.67 173.51,83.51 D29.2
NETD30_C
  Top 0.65: D30.2 169.12,83.25 169.12,60.28 173.04,56.36 182.75,56.36 183.09,56.69 IC2.3
NETD32_C  (1 unrouted)
  Top 0.65: IC1.8 146.59,19.19 146.53,19.24 D32.2
NETD33_C  (1 unrouted)
  Top 0.65: IC1.11 151.56,15.38 151.56,10.28 150.06,8.78 143.74,8.78 142.53,10 D33.2
NETD_1
  Bottom 0.65: S.2 163.96,56.99 163.62,57.32 D.1
NETD_2
  Bottom 0.65: F.1 142.9,57.32 142.92,57.34 150.57,57.34 150.59,57.32 D.2
NETD_3  (1 unrouted)
  Bottom 0.65: D.3 158.07,55.76 158.07,71.45 E.4
NETD_4
  Bottom 0.65: D.4 154.22,50.72 X.3
NETDELETE_2  (via drill 0.71 pad 2.5)  (1 unrouted)
  Top 0.65: v232.74,75.78 DEXTRA.1
  Bottom 0.65: v232.74,75.78 232.78,75.74 DELETE.2
NETE_1  (1 unrouted)
  Bottom 0.65: W.2 176.95,77.11 172.6,77.11 171.53,76.04 E.1
NETE_2  (1 unrouted)
  Bottom 0.65: R.1 E.2
NETENTER_2
  Bottom 0.65: L.2 13.51,56.99 ENTER.2
NETENTER_3
  Bottom 0.65: P.4 18.21,72.36 ENTER.3
NETENTER_4  (1 unrouted)
  Bottom 0.65: SPACE.4 110.72,9.19 47.99,9.19 46.73,10.45 42.91,10.45 41.55,9.08 24.88,9.08 24.14,8.35 10.19,8.35 6.58,11.95 6.58,22.51 8.08,24.01 8.08,62.58 11.61,62.58 ENTER.4
NETF_2
  Bottom 0.65: F.2 124.18,57.32 G.1
NETF_3
  Bottom 0.65: F.3 140.25,55.47 R.4
NETG_3  (1 unrouted)
  Bottom 0.65: T.4 119.95,70.8 119.95,56.08 G.3
NETG_4  (via drill 0.71 pad 2.5)  (1 unrouted)
  Top 0.65: v120.3,39.18 117.27,36.16 v117.27,32.43
  Bottom 0.65: G.4 120.3,49.77 v120.3,39.18 | v117.27,32.43 126.88,32.43 129.04,34.59 V.3
NETH_2
  Bottom 0.65: J.1 97.4,56.68 H.2
NETH_3
  Bottom 0.65: H.3 102.44,54.55 102.44,71.71 Y.4
NETI_1
  Bottom 0.65: I.1 U.2
NETI_2
  Bottom 0.65: I.2 64.05,75.41 O.1
NETI_4
  Bottom 0.65: K.3 64.65,54.55 64.65,69.51 64.69,69.55 I.4
NETJ_2
  Bottom 0.65: K.1 78.66,56.99 J.2
NETJ_3
  Bottom 0.65: J.3 83.7,54.24 83.7,58.79 84.04,59.14 U.4
NETJ_4
  Bottom 0.65: N.4 86.11,32.21 72.84,32.21 72.84,39.38 70.98,41.24 41.9,41.24 33.31,32.65 25.48,32.65 24.73,33.41 24.73,34.05 23.6,35.18 18.42,35.18 18.14,35.47 18.14,42.5 21.5,45.86 76.28,45.86 78.96,48.55 J.4
NETK_2
  Bottom 0.65: L.1 47.18,57.01 56.9,57.01 56.92,56.99 K.2
NETK_4
  Bottom 0.65: K.4 55.25,48.65 19.77,48.65 15.84,44.72 15.84,33 17.99,30.84 35.78,30.84 45.01,40.08 70.38,40.08 70.66,39.79 70.66,35.81 M.4
NETL_3
  Bottom 0.65: O.4 45.64,54.83 L.3
NETL_4
  Bottom 0.65: L.4 21.67,53.31 12.67,44.3 SYMB.3
NETM_1
  Bottom 0.65: M.1 76.48,39.35 87.41,39.35 N.2
NETO_2
  Bottom 0.65: P.1 31.96,74.81 31.96,71.52 32.41,71.06 40.21,71.06 44.55,75.41 O.2
NETQ_2  (1 unrouted)
  Bottom 0.65: W.1 185.8,77.85 194.32,77.85 Q.2
NETR_2
  Bottom 0.65: T.1 R.2
NETS_3  (1 unrouted)
  Bottom 0.65: S.3 178.39,53.31 177.17,54.53 177.17,56.28 174.19,59.25 171.84,59.25 171,60.09 171,66.06 172.89,67.23 W.4
NETS_4
  Bottom 0.65: Z.3 190.86,36.05 223.2,36.05 229.64,29.61 236.66,29.61 240.46,33.42 240.46,43.28 234.44,49.3 195.66,49.3 193.89,51.07 193.89,53.88 193.53,54.24 190.81,54.24 187.5,50.93 175.95,50.93 S.4
NETSPACE_1
  Bottom 0.65: SYMB.2 12.52,10.66 19.71,10.66 20.91,11.85 39.49,11.85 44.07,16.43 81.55,16.43 82.4,15.59 103.94,15.59 109.37,21.01 119.97,21.01 SPACE.1 124.73,20.92 162.77,20.92 165.69,18 182.51,18 182.86,17.65 235.25,17.65 239.96,12.94 251.39,12.94 251.39,18.93 SYMB1.3
NETSYMB1_1  (2 unrouted)
  Bottom 0.65: Z.4 187.63,29.73 204.69,29.73 206.84,31.88 207.78,31.88 209.21,33.31 219.87,33.31 226.11,27.07 239.57,27.07 SYMB1.1
NETSYMB1_2  (1 unrouted)
  Bottom 0.65: SYMB1.2 246.48,17.37 240.09,23.75 184.38,23.75 182.84,25.3 180.45,25.3 178.69,23.54 142.17,23.54 136,29.7 133.02,29.7 125.48,22.16 70.74,22.16 66.16,17.58 42.59,17.58 38.03,13.02 31.65,13.02 29.11,15.56 14.04,15.56 SYMB.4
NETU_1
  Bottom 0.65: U.1 Y.2
NETX_1  (1 unrouted)
  Bottom 0.65: X.1 180.92,38.27 181.25,37.94 Z.2
QUOTES  (via drill 0.71 pad 2.5)  (1 unrouted)
  Top 0.65: v223.95,20.26 223.22,19.52 D31.2 213.64,19.52 207.75,25.41 203.84,25.41 203.79,25.47 172.8,25.47 168.56,21.22 154.49,21.22 152.71,19.45 152.71,9.29 151.05,7.63 142.63,7.63 142.35,7.92 131.64,7.92 131.64,8.08 137.69,14.13 149.07,14.13 149.09,14.11 IC1.12
  Bottom 0.65: QUOTES.1 213.6,20.26 v223.95,20.26
RIGHT  (via drill 0.71 pad 2.5)  (1 unrouted)
  Top 0.65: D24.2 180.62,20.21 v177.62,20.21 | IC2.13 189.44,66.44 186.16,63.16 177.61,63.16 176.88,63.89 176.88,72.97 177.65,73.73 177.65,84.88 173.84,84.88 169.4,89.31 160.78,89.31 134.37,62.91 v134.37,27.62
  Bottom 0.65: v177.62,20.21 176.64,19.22 RIGHT.1 171.94,22.08 139.91,22.08 v134.37,27.62
SEMICOLON  (via drill 0.71 pad 2.5)  (4 unrouted)
  Top 0.65: 237.24,19.83 237.93,19.14 | IC1.9 141.94,17.87 138.99,17.87 138.99,24.07 143.18,28.26 202.87,28.26 204.55,26.58 213.56,26.58 217.04,23.1 226.67,23.1 230.64,19.14 237.93,19.14 | 237.93,19.14 D28.2
  Bottom 0.65: SEMICOLON.1 236.63,19.22 237.24,19.83
  other vias: 236.93,19.83
TRUEV  (via drill 0.71 pad 2.5)  (5 unrouted)
  Top 0.65: 246.79,93.61 246.81,93.59 | v183.54,54.17 184.36,54.98 IC2.4
  Top 0.7: v249.89,98.57 249.38,99.08 D19.2
  Bottom 0.65: 246.81,93.76 249.69,96.65 249.86,96.65 249.89,96.67 v249.89,98.57 | 246.81,93.59 TRUEV.1 243.42,92.04 225.17,92.04 223.7,90.57 223.7,81.68 226.18,79.2 240.02,79.2 241.48,77.74 241.48,70.98 237.56,67.06 216.89,67.06 200.28,50.45 196.16,50.45 195.41,51.2 195.41,54.13 194.13,55.41 184.79,55.41 v183.54,54.17
UP  (via drill 0.71 pad 2.5)
  Top 0.65: v84.48,17.67 83.39,18.76 D23.2 80.8,18.76 76.3,23.26 76.3,41.04 81.08,45.81 117.45,45.81 120.3,48.66 120.3,91.84 123.24,94.78 184.2,94.78 188.04,90.95 v188.04,85.87 | IC2.15 186.9,72.15 v190.02,75.28
  Bottom 0.65: v84.48,17.67 83.26,18.89 UP.1 | v190.02,75.28 193.75,75.28 195.15,73.88 199.01,73.88 202.01,76.88 202.01,81.4 201.32,82.08 191.82,82.08 v188.04,85.87
VCC  (via drill 0.71 pad 2.5)  (3 unrouted)
  Top 0.66: IC1.14 149.1,11.04 148.03,9.97 144.94,9.97 | v180.55,66.51 IC2.20
  Top 0.7: 98.82,26.14 R2.1 | 98.82,26.14 82.31,26.14 R3.1 | 144.94,9.97 143.34,11.57 138.84,11.57 v137.26,10 | v240.62,97.3 240.62,86.88 v246.03,81.47 | v223.95,62.83 220.88,59.76 220.88,47.36 v213.92,40.4 | v198.25,39.59 152.15,39.59 136.93,24.37 119.05,24.37 | v199.6,60.6 199.6,44.85 195.76,41.01 153.09,41.01 136.45,24.38 119.05,24.38 | 119.05,24.37 v127,16.42 | 119.05,24.38 119.05,24.37 | 119.05,24.38 100.88,24.38 99.94,25.19 98.82,26.14
  Bottom 0.7: v137.26,10 128.35,10 127,11.34 v127,16.42 | JP3.1 209.85,99.64 210.87,98.62 235.21,98.62 236.53,97.3 v240.62,97.3 | v246.03,81.47 248.29,81.47 249.46,80.31 249.46,71.24 241.99,63.77 224.89,63.77 v223.95,62.83 | v213.92,40.4 209.65,40.38 199.04,40.38 v198.25,39.59 | v180.55,66.51 186.46,60.6 v199.6,60.6
VET  (3 unrouted)
  Top 0.65: JP2.8 34.89,101.06 29.37,101.06 27.33,99.02 D2.2
  Bottom 0.65: JP2.8 34.89,100.52 11.69,100.52 8.08,96.92 8.08,65.52 8.97,64.63 39.14,64.63 42.42,61.36 42.42,55.16 19.23,55.16 10.37,46.29 10.37,21.68 10.09,21.4 7.76,21.4 7.76,18.57 9.6,16.73 | SPACE.2 113.17,18.59 105.75,11.17 47.78,11.6 41.76,11.6 40.4,10.23 23.73,10.23 22.99,9.5 11.48,9.5 7.75,13.23 7.75,15.64 9.6,16.73 | 9.6,16.73 19.15,16.73 21.62,19.19 31.62,19.19 ,_COMMA_.1